# Altium PCB PCB1-CISCO_AP.PcbDoc
Units mm, origin at the board's own origin, x right, y up, seen from the top; angles counter-clockwise.
Board outline 88.97 x 56.99 mm, 2 copper layers (Top Layer, Bottom Layer), stack 1.48 mm thick; 113 components, 49 nets, 356 pads, 284 vias.
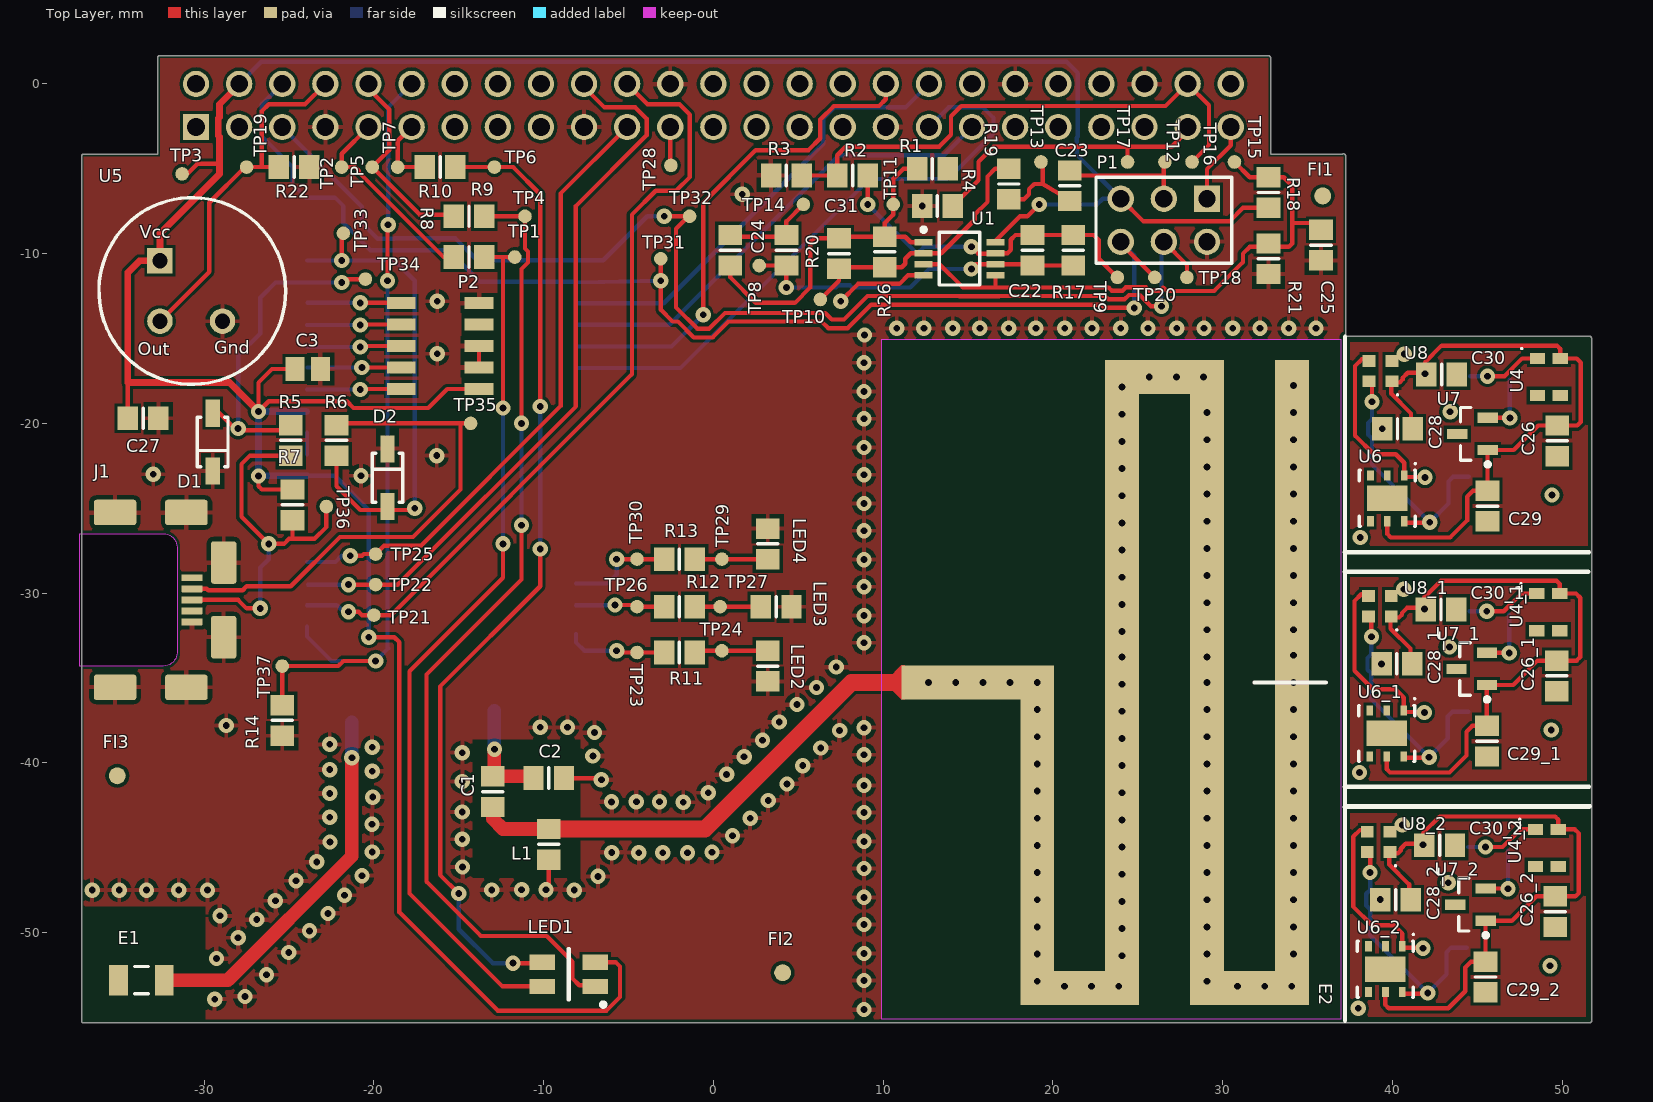
[diagram p0: Top Layer view]
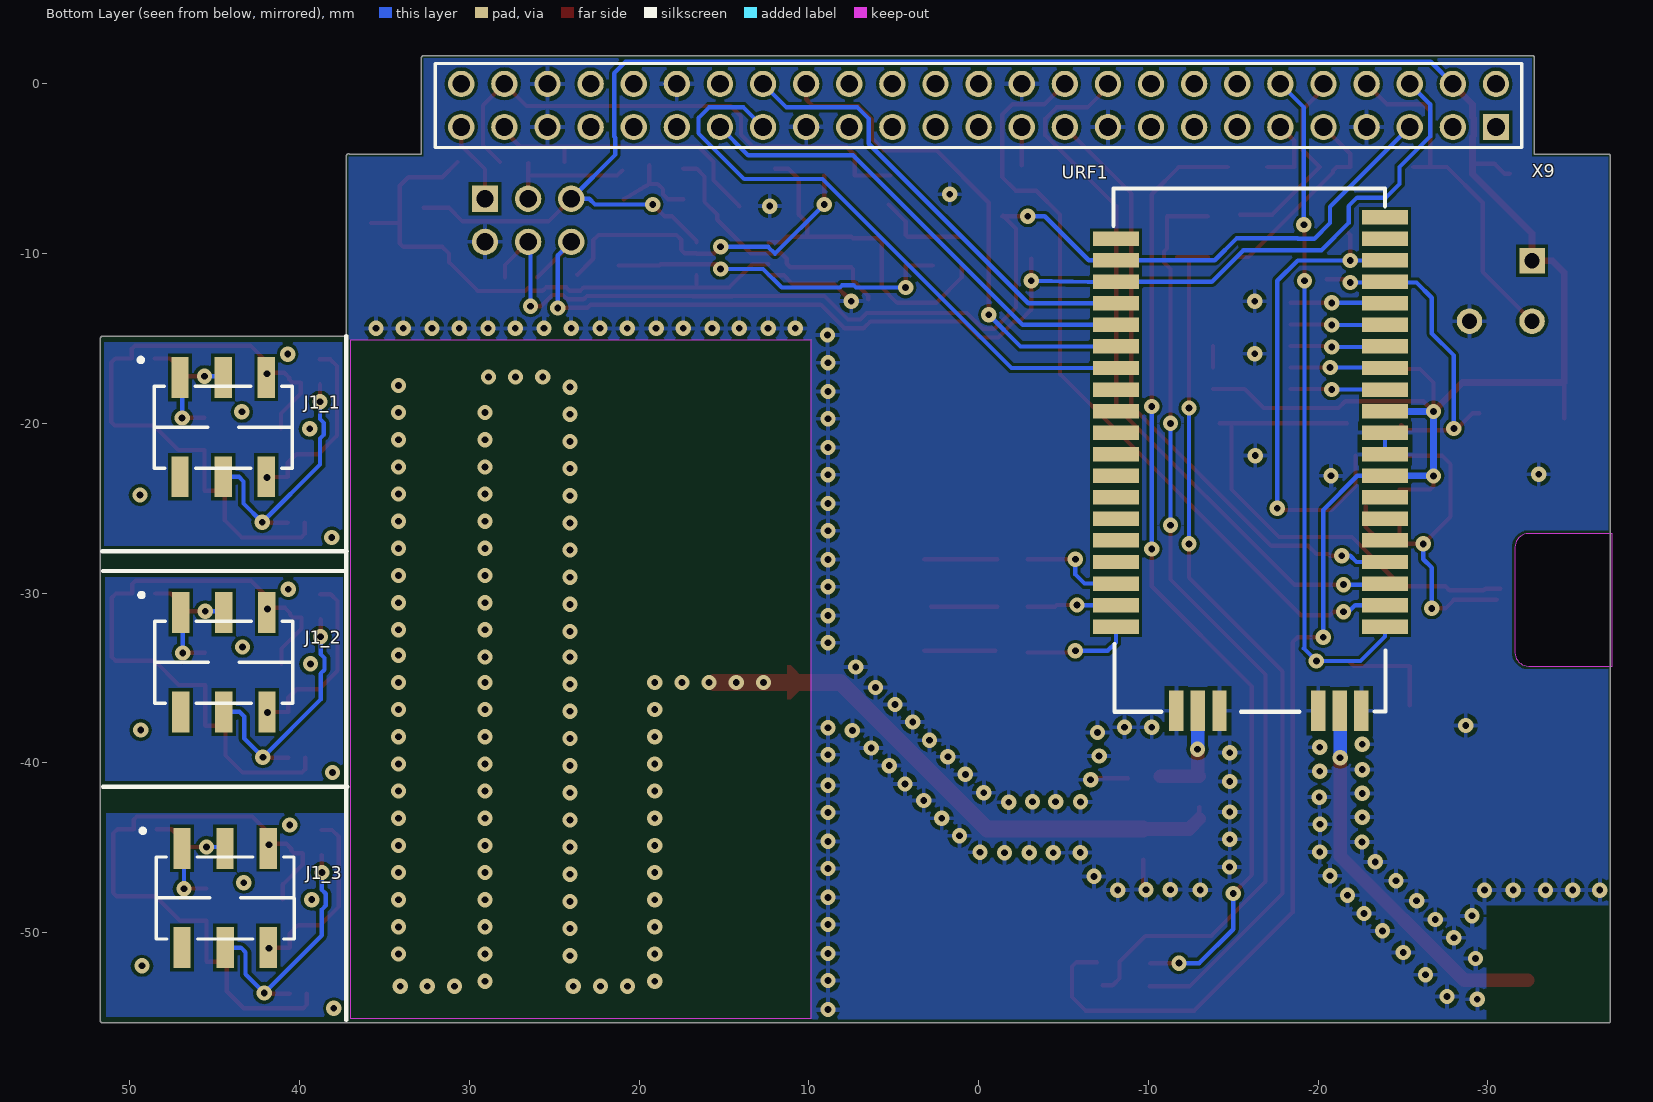
[diagram p1: Bottom Layer view, seen from below]

## Layer stack, top to bottom
Top Solder: solder mask 0.0102, Solder Resist, Dk 3.5
Top Layer: signal copper 0.0356
Dielectric 1: dielectric 1.4086, FR-4, Dk 4.8
Bottom Layer: signal copper 0.0356
Bottom Solder: solder mask 0.0102, Solder Resist, Dk 3.5

## Board outline
-37.1,-55.328 cw(c-37.1,-55.2) -37.227,-55.2 -37.227,-4.264 cw(c-37.1,-4.264) -37.1,-4.137 -32.747,-4.137 -32.747,1.536 cw(c-32.62,1.536) -32.62,1.663 32.7,1.663 cw(c32.7,1.536) 32.827,1.536 32.827,-4.137 37.067,-4.137 cw(c37.125,-4.25) 37.252,-4.25 37.252,-14.866 51.615,-14.866 cw(c51.615,-14.994) 51.742,-14.994 51.742,-55.2 cw(c51.615,-55.2) 51.615,-55.328

## Design rules (kind name [scope] priority, off if disabled: settings)
Clearance [All] p1: gap=0.19
PasteMaskExpansion [All] p1 off: expansion=0
PolygonConnect [All] p1: connectstyle=Relief reliefconductorwidth=0.254 reliefentries=4 polygonreliefangle="90 Angle" airgapwidth=0.254
RoutingVias [All] p1: holewidth=0.4 width=0.9 viastyle="Through Hole" minholewidth=0.3 minwidth=0.7 maxholewidth=0.711 maxwidth=1.27
SolderMaskExpansion [All] p1: expansion=0.102
Width [All] p1: maxlimit=1 minlimit=0.254 preferedwidth=0.254
29 further rules are at their usual default settings.

## Classes and differential pairs
component class Zoul: C1 C2 C3 D1 D2 E1 E2 J1 L1 LED2 LED3 LED4 P2 R5 R6 R7 R11 R12 R13 R14 TP21 TP22 TP23 TP24 TP25 TP26 TP27 TP28 TP29 TP30 TP31 TP32 TP33 TP34 TP35 TP36 TP37 URF1
component class Sensors: C22 C23 C24 C25 C27 C31 P1 R1 R2 R3 R4 R17 R18 R19 R20 R21 R22 R26 TP8 TP9 TP10 TP11 TP12 TP13 TP14 TP15 TP16 TP17 TP18 TP19 TP20 U1 U5
component class Connector: FI1 FI2 FI3 LED1 R8 R9 R10 TP1 TP2 TP3 TP4 TP5 TP6 TP7 X9

## Components (designator, comment, footprint, x,y, rotation, side; value= is the part's Value field where it differs from the comment)
C1 "Cap" 6-0805_N -13,-41.7 r270 top
C2 "Cap" 6-0805_N -9.7,-40.9 r180 top
C3 "Cap Pol3" C0805 -23.9,-16.8 r0 top
C22 "Cap" 6-0805_N 18.8,-9.8 r270 top
C23 "Cap" 6-0805_N 21,-6 r90 top
C24 "Cap" 6-0805_N 1,-9.8 r270 top
C25 "Cap" 6-0805_N 35.8,-9.5 r90 top
C26 "Cap" 6-0805_N 49.72,-21.029 r90 top
C26_1 "Cap" 6-0805_N 49.682,-34.878 r90 top (schematic designator C26)
C26_2 "Cap" 6-0805_N 49.605,-48.769 r90 top (schematic designator C26)
C27 "Cap" 6-0805_N -33.6,-19.7 r180 top
C28 "Cap" 6-0805_N 40.306,-20.32 r0 top
C28_1 "Cap" 6-0805_N 40.268,-34.169 r0 top (schematic designator C28)
C28_2 "Cap" 6-0805_N 40.191,-48.06 r0 top (schematic designator C28)
C29 "Cap" 6-0805_N 45.609,-24.875 r90 top
C29_1 "Cap" 6-0805_N 45.571,-38.724 r90 top (schematic designator C29)
C29_2 "Cap" 6-0805_N 45.494,-52.615 r90 top (schematic designator C29)
C30 "Cap" 6-0805_N 42.906,-17.12 r180 top
C30_1 "Cap" 6-0805_N 42.868,-30.969 r180 top (schematic designator C30)
C30_2 "Cap" 6-0805_N 42.791,-44.86 r180 top (schematic designator C30)
C31 "Cap" 6-0805_N 7.4,-10 r270 top
D1 "3V3" 425 -29.5,-21.1 r90 top
D2 "3V3" 425 -19.2,-23.2 r270 top
E1 "Antenna" INDC3216 -33.7,-52.8 r180 top
E2 "Component_1" DNO24 20.08,-35.264 r270 top
FI1 "Fidutial" FIDU 35.9,-6.6 r0 top
FI2 "Fidutial" FIDU 4.08,-52.364 r0 top
FI3 "Fidutial" FIDU -35.12,-40.764 r0 top
J1 "USB Micro Type B" USB_MICRO-B_MOLEX_SMD -37.2,-30.4 r0 top
J1_1 "SMTC-SSW-103-01-X-D" SMTC-SSW-103-22-X-S-VS 44.507,-21.431 r180 bottom (schematic designator J1)
J1_2 "SMTC-SSW-103-01-X-D" SMTC-SSW-103-22-X-S-VS 44.469,-35.28 r180 bottom (schematic designator J1)
J1_3 "SMTC-SSW-103-01-X-D" SMTC-SSW-103-22-X-S-VS 44.392,-49.171 r180 bottom (schematic designator J1)
L1 "Inductor" 6-0805_N -9.7,-44.8 r270 top
LED1 "WE-LED_RGB_A1B2R3G4-4" 3528_A -8.52,-52.464 r180 top
LED2 "150080GS75000" 6-0805_N 3.2,-34.3 r270 top
LED3 "150080RS75000" 6-0805_N 3.7,-30.8 r0 top
LED4 "5988191107F" 6-0805_N 3.2,-27.1 r90 top
P1 "SMTC-TSW-103-08-X-D" SMTC-TSW-103-08-X-D 29.08,-6.764 r180 top
P2 "FTSH-105-01-L-DV-K" JTAG -16.1,-12.9 r180 top
R1 "Res3" 6-0805_N 12.9,-5 r0 top
R2 "Res3" 6-0805_N 8.2,-5.4 r180 top
R3 "Res3" 6-0805_N 4.3,-5.4 r180 top
R4 "Res3" 6-0805_N 13.2,-7.2 r180 top
R5 "Res3" 6-0805_N -24.9,-21 r90 top
R6 "Res3" 6-0805_N -22.2,-21 r270 top
R7 "Res3" 6-0805_N -24.8,-24.8 r90 top
R8 "Res3" 6-0805_N -14.4,-10.2 r180 top
R9 "Res3" 6-0805_N -14.4,-7.8 r180 top
R10 "Res3" 6-0805_N -16.1,-4.9 r180 top
R11 "Res3" 6-0805_N -2,-33.5 r180 top
R12 "Res3" 6-0805_N -2,-30.8 r180 top
R13 "Res3" 6-0805_N -2,-28 r180 top
R14 "Res3" 6-0805_N -25.4,-37.5 r90 top
R17 "Res3" 6-0805_N 21.2,-9.8 r270 top
R18 "Res3" 6-0805_N 32.7,-6.4 r270 top
R19 "Res3" 6-0805_N 17.4,-5.9 r270 top
R20 "Res3" 6-0805_N 4.3,-9.8 r90 top
R21 "Res3" 6-0805_N 32.7,-10.3 r90 top
R22 "Res3" 6-0805_N -24.7,-4.9 r180 top
R26 "Res3" 6-0805_N 10.1,-9.9 r270 top
TP1 "TEST_POINT" TP -11.7,-10.2 r90 top
TP2 "TEST_POINT" TP -21.9,-4.9 r90 top
TP3 "TEST_POINT" TP -31.3,-5.3 r90 top
TP4 "TEST_POINT" TP -11.1,-7.8 r90 top
TP5 "TEST_POINT" TP -20.1,-4.9 r90 top
TP6 "TEST_POINT" TP -12.9,-4.9 r90 top
TP7 "TEST_POINT" TP -18.6,-4.9 r90 top
TP8 "TEST_POINT" TP 2.7,-10.7 r90 top
TP9 "TEST_POINT" TP 23.8,-11.4 r90 top
TP10 "TEST_POINT" TP 6.3,-12.7 r90 top
TP11 "TEST_POINT" TP 10.6,-7.1 r90 top
TP12 "TEST_POINT" TP 26.6,-4.6 r180 top
TP13 "TEST_POINT" TP 19.3,-4.6 r180 top
TP14 "TEST_POINT" TP 5.3,-7.1 r90 top
TP15 "TEST_POINT" TP 30.7,-4.6 r180 top
TP16 "TEST_POINT" TP 28.2,-4.6 r180 top
TP17 "TEST_POINT" TP 24.4,-4.6 r180 top
TP18 "TEST_POINT" TP 27.9,-11.4 r0 top
TP19 "TEST_POINT" TP -27.5,-4.9 r90 top
TP20 "TEST_POINT" TP 26,-11.4 r0 top
TP21 "TEST_POINT" TP -20,-31.3 r90 top
TP22 "TEST_POINT" TP -19.9,-29.5 r90 top
TP23 "TEST_POINT" TP -4.5,-33.5 r90 top
TP24 "TEST_POINT" TP 0.5,-33.4 r90 top
TP25 "TEST_POINT" TP -19.9,-27.7 r90 top
TP26 "TEST_POINT" TP -4.5,-30.8 r90 top
TP27 "TEST_POINT" TP 0.4,-30.8 r90 top
TP28 "TEST_POINT" TP -2.5,-4.8 r90 top
TP29 "TEST_POINT" TP 0.5,-28 r90 top
TP30 "TEST_POINT" TP -4.5,-28 r90 top
TP31 "TEST_POINT" TP -3.1,-10.3 r90 top
TP32 "TEST_POINT" TP -1.4,-7.8 r90 top
TP33 "TEST_POINT" TP -21.8,-8.8 r90 top
TP34 "TEST_POINT" TP -20.5,-11.5 r90 top
TP35 "TEST_POINT" TP -14.3,-20 r90 top
TP36 "TEST_POINT" TP -22.8,-24.9 r90 top
TP37 "TEST_POINT" TP -25.4,-34.3 r90 top
U1 "ONSC-LM358_NCV2904-8" ONSC-MICRO-8-846A-02_H_V 14.5,-10.3 r0 top
U4 "SPW2430HR5H" DFN3127P600-8N 49.223,-17.275 r0 top
U4_1 "SPW2430HR5H" DFN3127P600-8N 49.185,-31.123 r0 top (schematic designator U4)
U4_2 "SPW2430HR5H" DFN3127P600-8N 49.108,-45.015 r0 top (schematic designator U4)
U5 "EKMC1601111" EKMC1601111 -30.7,-12.2 r0 top
U6 "HTU20D" HTU20D_DFN6 39.706,-24.42 r270 top
U6_1 "HTU20D" HTU20D_DFN6 39.668,-38.269 r270 top (schematic designator U6)
U6_2 "HTU20D" HTU20D_DFN6 39.591,-52.16 r270 top (schematic designator U6)
U7 "MCP9700AT-E/TT" SOT-23-TT3_L 44.719,-20.618 r180 top
U7_1 "MCP9700AT-E/TT" SOT-23-TT3_L 44.681,-34.466 r180 top (schematic designator U7)
U7_2 "MCP9700AT-E/TT" SOT-23-TT3_L 44.604,-48.357 r180 top (schematic designator U7)
U8 "LTR-329ALS" ChipLED4Pin2X2X07 39.306,-16.92 r180 top
U8_1 "LTR-329ALS" ChipLED4Pin2X2X07 39.268,-30.769 r180 top (schematic designator U8)
U8_2 "LTR-329ALS" ChipLED4Pin2X2X07 39.191,-44.66 r180 top (schematic designator U8)
URF1 "RF core with cc2538 and cc1200" ZOUL -16.02,-22.464 r90 bottom
X9 "TSW-125-07-G-D" CISCO_AP_SSW-125-01-X-D -0.04,-1.285 r0 bottom

## Footprints (in the part's own frame and the unit in brackets; to place one, negate y for a bottom-side part, rotate by r counter-clockwise, add the part's x,y. Pads: shape width x height; smd on the part's side, far side on the other; paste and mask are expansions set on the pad)
6-0805_N [mm] "Chip Resistor, Body 2.0x1.2mm, IPC Medium Density"
  rect 1.2x1.4 smd: 1(-0.9,0) 2(0.9,0)
  silkscreen extent 0,-0.6 0,0.6, body extent -1.07,-0.7 1.07,0.7, height 0.7
425 [mm] "SOD-123; 2 Leads; Body 2.7 x 1.6 mm, (LxW)"
  rect 1.6x0.85 smd: 1(-1.7,0) 2(1.7,0)
  silkscreen extent -1.45,-0.9 1.45,0.9
3528_A [mm] "Chip LED, 4-Leads, Body 2.8x3.5mm (max), Pitch 1.42mm, IPC Medium Density"
  rect 1.5x0.9 smd: 1(-1.55,0.707) 2(-1.55,-0.707) 3(1.55,-0.71) 4(1.55,0.707)
  silkscreen extent -2.16,-1.5 0.03,1.9, body extent -1.75,-1.4 1.75,1.4, height 1.87
C0805 [mm] "Chip Capacitor, Body 2.0x1.3mm, IPC High Density"
  rect 1.1x1.4 smd: 1(-0.75,0) 2(0.75,0)
  body extent -1.1,-0.72 1.1,0.72, height 1.4
ChipLED4Pin2X2X07 [mm]
  rect 0.75x0.7 smd: 1(-0.675,0.6) 2(-0.675,-0.6) 3(0.675,-0.6) 4(0.675,0.6)
  silkscreen extent -1.05,1.35 -0.95,1.45, body extent -1,-1 1,1, height 0.7
CISCO_AP_SSW-125-01-X-D [mm]
  rect 1.55x1.55 hole 1.04: 1(-30.44,1.255)
  round 1.55 hole 1.04: 2(-30.44,-1.285) 3(-27.9,1.255) 4(-27.9,-1.285) 5(-25.36,1.255) 6(-25.36,-1.285) 7(-22.82,1.255) 8(-22.82,-1.285) 9(-20.28,1.255) 10(-20.28,-1.285) 11(-17.74,1.255) 12(-17.74,-1.285) 13(-15.2,1.255) 14(-15.2,-1.285) 15(-12.66,1.255) 16(-12.66,-1.285) 17(-10.12,1.255) 18(-10.12,-1.285) 19(-7.58,1.255) 20(-7.58,-1.285) 21(-5.04,1.255) 22(-5.04,-1.285) 23(-2.5,1.255) 24(-2.5,-1.285) 25(0.04,1.255) 26(0.04,-1.285) 27(2.58,1.255) 28(2.58,-1.285) 29(5.12,1.255) 30(5.12,-1.285) 31(7.66,1.255) 32(7.66,-1.285) 33(10.2,1.255) 34(10.2,-1.285) 35(12.74,1.255) 36(12.74,-1.285) 37(15.28,1.255) 38(15.28,-1.285) 39(17.82,1.255) 40(17.82,-1.285) 41(20.36,1.255) 42(20.36,-1.285) 43(22.9,1.255) 44(22.9,-1.285) 45(25.44,1.255) 46(25.44,-1.285) 47(27.98,1.255) 48(27.98,-1.285) 49(30.52,1.255) 50(30.52,-1.285)
  silkscreen extent -31.97,-2.49 32.05,2.46, body extent -31.96,-2.49 32.04,2.46, height 8.41
DFN3127P600-8N [mm] "SPW2430HR5H MEMS Microphone"
  rect 0.9x0.65 smd: 1(-0.675,1.095) 2(-0.675,-1.095) 3(0.675,-1.095) 4(0.675,1.095)
  silkscreen extent -1.65,1.63 -1.55,1.73, body extent -1.25,-1.55 1.25,1.55, height 1
DNO24 [mm] "Monopole PCB Antenna with Single or Dual Band Option"
  rect 2x9 smd paste+0 mask+0: 0(0,-4.5)
  rect 2x7 smd paste+0 mask+0: ""(-18,6.5) ""(18,11.5) ""(18,1.5)
  rect 38x2 smd paste+0 mask+0: ""(0,14) ""(0,9) ""(0,4)
  rect 20x2 smd paste+0 mask+0: ""(9,-1)
  Top Layer region: -1,-8.8 1,-8.8 1,-9 0.2,-9.8 -0.201,-9.8 -1,-8.998
  Keep-Out Layer pour cut-out: -20.2,16.9 -20.2,-10.2 19.8,-10.2 19.8,16.9
  silkscreen extent 0,11.8 0,16
EKMC1601111 [mm] "Panasonic PIR Motion sensor 3 Leads; Pin Circle Dia. 5.08 mm; Lead Dia. 0.53 mm (max)"
  rect 1.5x1.5 hole 0.9: 1(-1.905,1.778)
  round 1.5 hole 0.9: 2(1.778,-1.778) 3(-1.905,-1.778)
  silkscreen extent -5.5,-5.5 5.5,5.5, body extent -6,-6 6,6, height 15
FIDU [mm] "Fidutial_PCB"
  round 1 smd paste-1 mask+0.5: 0(0,0)
HTU20D_DFN6 [mm] "HTU20D, 6-Leads, Body 3.00x3.00mm, Pitch 1.00mm, Thermal Pad 2.40x1.50mm, IPC Medium Density"
  rect 0.6x0.4 smd: 1(-1.35,1) 2(-1.35,0) 3(-1.35,-1) 4(1.35,-1) 5(1.35,0) 6(1.35,1)
  rect 1.5x2.4 smd: 7(0,0)
  silkscreen extent -2.1,-1.65 1.65,1.7, body extent -1.5,-1.5 1.5,1.5, height 1
INDC3216 [mm] "Chip Inductor, Body 3.2x1.6mm, IPC High Density"
  rect 1.1x1.8 smd: 1(-1.35,0) 2(1.35,0)
  silkscreen extent -0.4,-0.8 0.4,0.8, body extent -1.7,-0.9 1.7,0.9, height 0.55
JTAG [mm]
  rect 1.7x0.7 smd: 1(-2.286,5.08) 2(2.286,5.08) 3(-2.286,3.81) 4(2.286,3.81) 5(-2.286,2.54) 6(2.286,2.54) 7(-2.286,1.27) 8(2.286,1.27) 9(-2.286,0) 10(2.286,0)
  body extent -3.05,-0.63 3.05,5.72, height 6.1
ONSC-MICRO-8-846A-02_H_V [mm] "MiniSO-8 8-Leads, Body 3.1x3.1mm, Pitch 0.65mm"
  rect 1.04x0.38 smd: 1(-2.12,0.975) 2(-2.12,0.325) 3(-2.12,-0.325) 4(-2.12,-0.975) 5(2.12,-0.975) 6(2.12,-0.325) 7(2.12,0.325) 8(2.12,0.975)
  silkscreen extent -2.24,-1.55 1.2,1.84, body extent -1.55,-1.55 1.55,1.55, height 1.1
SMTC-SSW-103-22-X-S-VS [mm] "SQ Post Socket, 3 Pins, Vertical, 2.54mm Pitch, Female"
  rect 1.02x2.41 smd: 1(-2.54,-1.715) 2(-2.545,4.135) 3(0,-1.715) 4(-0.005,4.135) 5(2.54,-1.715) 6(2.535,4.135)
  silkscreen extent -4.98,-1.2 4.07,5.29, body extent -4.07,-2.58 4.06,5, height 9.78
SMTC-TSW-103-08-X-D [mm] ".025 SQ Post Terminal Strip Assembly, 2x3 Pins, Vertical, 2.54mm Pitch, Male"
  rect 1.55x1.55 hole 1.02: 1(0,0)
  round 1.55 hole 1.02: 2(0,2.54) 3(2.54,0) 4(2.54,2.54) 5(5.08,0) 6(5.08,2.54)
  silkscreen extent -1.46,-1.27 6.54,3.81, body extent -1.27,-1.27 6.35,3.81, height 8.38
SOT-23-TT3_L [mm] "SOT23, 3-Leads, Body 2.9x1.3mm, Pitch 0.95mm, Lead Span 2.4mm, IPC High Density"
  rect 1.2x0.6 smd: 1(-0.9,0.95) 2(-0.9,-0.95) 3(0.9,0)
  silkscreen extent -1.02,-1.55 0.7,1.92, body extent -0.7,-1.52 0.7,1.53, height 1.12
TP [mm] "Test point to manufacturing"
  round 0.8 smd paste-1: 1(0,0)
USB_MICRO-B_MOLEX_SMD [mm]
  round 0.508 on Mech15: 0(0,0)
  rrect20% 1.25x0.4 smd: 1(6.475,1.3) 2(6.475,0.65) 3(6.475,0) 4(6.475,-0.65) 5(6.475,-1.3)
  rrect20% 2.5x1.5 smd: SH(1.95,-5.15) SH(1.95,5.15) SH(6.15,-5.15) SH(6.15,5.15)
  rrect20% 1.5x2.5 smd: SH(8.35,-2.2) SH(8.35,2.2)
  Keep-Out Layer board cut-out: -0.127,3.9 4.8,3.9 5.106,3.839 5.366,3.666 5.539,3.406 5.6,3.1 5.6,3.1 5.6,-3.1 5.539,-3.406 5.366,-3.666 5.106,-3.839 4.8,-3.9 4.8,-3.9 -0.127,-3.9
  body extent -21.01,-5.5 8.7,5.5, height 4.1
ZOUL [mm]
  rect 0.85x2.7 smd: 1(-9.513,-7.925) 2(-8.243,-7.925) 3(-6.973,-7.925) 4(-5.703,-7.925) 5(-4.433,-7.925) 6(-3.163,-7.925) 7(-1.893,-7.925) 8(-0.623,-7.925) 9(0.647,-7.925) 10(1.917,-7.925) 11(3.187,-7.925) 12(4.457,-7.925) 13(5.727,-7.925) 14(6.997,-7.925) 15(8.267,-7.925) 16(9.537,-7.925) 17(10.807,-7.925) 18(12.077,-7.925) 19(13.347,-7.925) 20(14.617,-7.925) 21(13.347,7.925) 22(12.077,7.925) 23(10.807,7.925) 24(9.537,7.925) 25(8.267,7.925) 26(6.997,7.925) 27(5.727,7.925) 28(4.457,7.925) 29(3.187,7.925) 30(1.917,7.925) 31(0.647,7.925) 32(-0.623,7.925) 33(-1.893,7.925) 34(-3.163,7.925) 35(-4.433,7.925) 36(-5.703,7.925) 37(-6.973,7.925) 38(-8.243,7.925) 39(-9.513,7.925)
  rect 2.4x0.85 smd: 40(-14.466,4.367) 41(-14.466,3.097) 42(-14.466,1.827) 43(-14.466,-3.99) 44(-14.466,-5.26) 45(-14.466,-6.53)
  silkscreen extent -14.52,-7.95 16.3,8.08, body extent -14.45,-8.28 16.44,8.5, height 1.93

## Part data
C1 C2 C22 C23 C24 C25 C26 C26_1 C26_2 C27 C28 C28_1 C28_2 C29 C29_1 C29_2 C30 C30_1 C30_2 C31: "Capacitor"
C3: "Polarized Capacitor (Surface Mount)"
D1 D2: library part "D Zener", "Zener Diode"
E1: "Generic Antenna"
E2: "Antenna SubGhz PCB"
FI1 FI2 FI3: "Fidutial_component"
J1: library part USB_Micro_TypeB_1, "Connector SMD USB Micro Type B middle mount"
LED2: library part "WL-SMCW 0805  150080GS75000", "SMD mono-color Chip LED, WL-SMCW, Green"
LED3: library part "WL-SMCW 0805  150080RS75000", "SMD mono-color Chip LED, WL-SMCW, Red"
LED4: library part LED0, "Blue 473nm LED Indication - Discrete 3.2V 0805 (2012 Metric)"
P2: library part Component_1
R1 R2 R3 R4 R5 R6 R7 R8 R9 R10 R11 R12 R13 R14 R17 R18 R19 R20 R21 R22 R26: "Resistor"
TP1 TP2 TP3 TP4 TP5 TP6 TP7 TP8 TP9 TP10 TP11 TP12 TP13 TP14 TP15 TP16 TP17 TP18 TP19 TP20 TP21 TP22 TP23 TP24 TP25 TP26 TP27 TP28 TP29 TP30 TP31 TP32 TP33 TP34 TP35 TP36 TP37: "Point of test to manufacturing"
U4 U4_1 U4_2: "Knowles MEMS Microphone"
U5: "EKMC1601111 Panasonic PIR Motion Detection Module"
U6 U6_1 U6_2: "Digital relative Humidity sensor with temperature output"
U7 U7_1 U7_2: library part CMP-0192-00218-1, "Low-Power Linear Active Thermistor IC, 3-Pin SOT-23, Extended Temperature, Tape and Reel"
U8 U8_1 U8_2: "Digital Ambient Light Sensor"
URF1: library part ZOUL
X9: library part CON-Samtec-TSW-125-07-G-D-Male, "Header, 2x25 Pins, 2.54 mm pitch"

## Via types
v1: diameter 0.9, hole 0.4, Top Layer to Bottom Layer, 284 vias

## Nets (pads, with @x,y where several pads share a name; then routed paths per layer and width w, separated by ;. In a path a pad name is that pad's centre, name@x,y a point inside that pad or via, vN(x,y) a via of type N, cw(c..) or ccw(c..) an arc to the next point about the centre after c; other vN are vias at no path point)
B: R10.2 TP7.1 X9.11 | length 4.3
  Top Layer w0.254: X9.11 -18.592,-3.352 -18.592,-4.892 TP7.1 R10.2
G: R8.2 TP2.1 X9.9 | length 11.9
  Top Layer w0.254: X9.9 -21.9,-4.12 TP2.1 -21.1,-4.9 -20.881,-5.119 -20.881,-5.223 -15.904,-10.2 R8.2
GND: C2.1 C3.2 C25.1 C27.1 D1.1 D2.1 J1.5 J1.SH L1.2 LED2.2 LED3.2 LED4.2 P1.2 P2.3 P2.5 P2.9 R3.2 R4.2 R14.1 R21.1 R22.1 U1.4 U5.2 URF1.9 URF1.10 URF1.40 URF1.42 URF1.43 URF1.45 X9.7 X9.19 X9.24 X9.33 X9.40 X9.45 X9.46 | length 11.9
  Top Layer w0.254: P2.3 P2.5 ; v1@-9.7,-47.4 L1.2 ; C2.1 v1@-6.7,-40.9 ; v1(7.5,-12.8) 8.519,-11.781 10.958,-11.781 11.464,-11.275 U1.4
  Bottom Layer w0.254: URF1.9 URF1.10
  other v1: 8.873,-54.527 -29.373,-53.927 -27.599,-53.771 8.873,-52.827 -26.333,-52.487 -29.273,-51.527 8.873,-51.227 -25.023,-51.172 -28,-50.3 -23.8,-49.9 8.873,-49.527 -26.901,-49.236 -29.075,-49.015 -22.71,-48.872 -25.805,-48.125 8.873,-47.927 -21.729,-47.804 -36.6,-47.5 -35,-47.5 -33.4,-47.5 -31.5,-47.5 -29.8,-47.5 -13.064,-47.486 -8.2,-47.5 -11.298,-47.472 -9.865,-47.472 -24.594,-46.945 -6.799,-46.69 -20.699,-46.656 8.873,-46.227 -14.786,-46.139 -23.375,-45.834 -4.4,-45.3 -2.981,-45.304 -1.526,-45.304 -5.984,-45.29 -0.085,-45.271 -20.095,-45.257 -22.594,-44.668 8.873,-44.627 -14.8,-44.5 1.128,-44.298 -20.111,-43.623 2.167,-43.27 -22.6,-43.2 8.873,-42.927 -14.8,-42.9 -1.774,-42.32 -6,-42.3 -4.537,-42.299 -3.173,-42.299 3.228,-42.221 -20.071,-42.021 -22.6,-41.8 -0.309,-41.762 8.873,-41.327 4.332,-41.248 -14.8,-41.1 -6.6,-41 0.779,-40.68 -20.103,-40.499 -22.6,-40.4 5.261,-40.165 1.811,-39.647 -7.1,-39.6 8.873,-39.527 -14.8,-39.4 6.322,-39.126 -20.103,-39.082 -22.6,-38.9 2.889,-38.67 -7.001,-38.207 7.437,-38.099 8.873,-37.927 -10.2,-37.9 -8.6,-37.9 -28.7,-37.8 3.884,-37.591 4.921,-36.568 6.078,-35.555 7.238,-34.348 8.873,-32.927 8.873,-31.327 8.873,-29.627 8.873,-28.027 8.873,-26.327 8.873,-24.727 -20.762,-23.088 8.873,-23.027 -33,-23 -16.3,-21.9 8.873,-21.427 8.873,-19.727 8.873,-18.127 8.873,-16.427 -16.264,-15.9 8.9,-14.8 10.8,-14.4 12.4,-14.4 14.1,-14.4 15.7,-14.4 17.4,-14.4 19,-14.4 20.7,-14.4 22.3,-14.4 24,-14.4 25.6,-14.4 27.3,-14.4 28.9,-14.4 30.6,-14.4 32.2,-14.4 33.9,-14.4 35.5,-14.4 -16.264,-12.8 12.3,-7.2 1.7,-6.5
NetC1_1: C1.1 C2.2 URF1.41 | length 6.1
  Top Layer w0.8: C1.1 C2.2@-10.7,-40.8 ; C1.1@-12.923,-40.723 -12.9,-40.7 v1(-12.9,-39.2)
  Bottom Layer w0.8: URF1.41 -12.9,-36.953 v1(-12.9,-39.2)
NetC1_2: C1.2 E2. E2.0 L1.1 | length 33.1
  Top Layer w0.254: -13,-43.3 C1.2
  Top Layer w0.8: -13,-43.3 -12.4,-43.9 L1.1
  Top Layer w1: L1.1 -0.5,-43.9 8.136,-35.264 E2.0
  other v1: 20.68,-53.164 22.28,-53.164 23.88,-53.164 30.88,-53.164 32.48,-53.164 34.08,-53.164 19.08,-52.864 29.08,-52.864 24.08,-51.364 19.08,-51.264 29.08,-51.264 34.18,-51.264 24.08,-49.764 19.08,-49.664 29.08,-49.664 34.18,-49.664 24.08,-48.164 19.08,-48.064 29.08,-48.064 34.18,-48.064 24.08,-46.564 19.08,-46.464 29.08,-46.464 34.18,-46.464 24.08,-44.964 19.08,-44.864 29.08,-44.864 34.18,-44.864 24.08,-43.364 19.08,-43.264 29.08,-43.264 34.18,-43.264 24.08,-41.764 19.08,-41.664 29.08,-41.664 34.18,-41.664 24.08,-40.164 19.08,-40.064 29.08,-40.064 34.18,-40.064 24.08,-38.564 19.08,-38.464 29.08,-38.464 34.18,-38.464 24.08,-36.964 19.08,-36.864 29.08,-36.864 34.18,-36.864 24.08,-35.364 12.68,-35.264 14.28,-35.264 15.88,-35.264 17.48,-35.264 19.08,-35.264 29.08,-35.264 34.18,-35.264 24.08,-33.764 29.08,-33.764 34.18,-33.664 24.08,-32.264 29.08,-32.164 34.18,-32.164 24.08,-30.664 29.08,-30.564 34.18,-30.564 24.08,-29.064 29.08,-28.964 34.18,-28.964 24.08,-27.464 29.08,-27.364 34.18,-27.364 24.08,-25.864 29.08,-25.764 34.18,-25.764 24.08,-24.264 29.08,-24.164 34.18,-24.164 24.08,-22.664 29.08,-22.564 34.18,-22.564 24.08,-21.064 29.08,-20.964 34.18,-20.964 24.08,-19.464 29.08,-19.364 34.18,-19.364 24.08,-17.864 34.18,-17.764 25.68,-17.264 27.28,-17.264 28.88,-17.264
NetC22_1: C22.1 R2.1 R17.1 TP9.1 U1.7 | length 20.2
  Top Layer w0.254: v1(9.1,-7.1) R2.1 ; v1(15.2,-9.6) 15.6,-10 U1.7@16.595,-10 ; U1.7 17.325,-9.975 17.521,-9.779 17.521,-9.179 17.8,-8.9 C22.1 R17.1 22.4,-8.9 22.7,-9.2 22.7,-10.3 TP9.1@23.65,-11.25
  Bottom Layer w0.254: v1(9.1,-7.1) 12,-10 12.4,-9.6 v1(15.2,-9.6)
NetC22_2: C22.2 R17.2 R20.1 TP8.1 U1.6 | length 20
  Top Layer w0.254: TP8.1 R20.1 v1(4.3,-12) ; v1@15.475,-10.625 U1.6 C22.2@18.725,-10.625 ; C22.2 R17.2
  Bottom Layer w0.254: v1(4.3,-12) 7.225,-12 7.356,-11.869 8.044,-11.869 8.175,-12 11.6,-12 12.7,-10.9 v1(15.2,-10.9)
NetC23_1: C23.1 R19.2 TP13.1 | length 5.4
  Top Layer w0.254: R19.2 18.3,-6.8 18.6,-6.5 18.6,-6.2 18.9,-5.9 19.4,-5.9 ; TP13.1@19.4,-4.8 19.4,-5.9 ; C23.1@20.9,-6.8 19.4,-5.9
NetC23_2: C23.2 P1.3 TP12.1 | length 7.8
  Top Layer w0.254: C23.2 21.3,-5.4 26.54,-5.4 ; P1.3 26.54,-5.4 ; TP12.1@26.54,-4.66 26.54,-5.4
NetC24_1: C24.1 R20.2 TP14.1 | length 5.4
  Top Layer w0.254: C24.1@1.054,-9 R20.2@4.2,-9 ; R20.2 4.3,-8.1 TP14.1
NetC24_2: C24.2 C31.1 R1.1 R26.1 TP11.1 U1.1 | length 21.1
  Top Layer w0.254: C24.2 1,-11.4 2.5,-12.9 4.8,-12.9 5.7,-12 5.7,-9.32 5.92,-9.1 C31.1 ; C31.1@7.5,-9 R26.1 ; R1.1 11.2,-5 10.6,-5.6 TP11.1 10.6,-7.7 10.1,-8.2 R26.1 ; U1.1 11.625,-9.325 11.3,-9 R26.1
NetC25_2: C25.2 R18.1 R21.2 TP15.1 U1.3 U1.5 | length 34
  Top Layer w0.254: U1.3 13.325,-10.625 14.7,-12 16.62,-12 U1.5 ; 16.6,-11.992 23.287,-11.992 23.477,-12.181 24.106,-12.181 24.298,-11.989 25.484,-11.989 25.676,-12.181 26.323,-12.181 26.511,-11.993 26.718,-12.2 29.5,-12.2 31.2,-10.5 31.2,-10 31.6,-9.6 33.9,-9.6 34.1,-9.4 34.1,-6 33.6,-5.5 R18.1 31.6,-5.5 TP15.1 ; 34.1,-8.2 C25.2@35.8,-8.2
NetC31_2: C31.2 R19.1 R26.2 TP10.1 U1.2 | length 15.7
  Top Layer w0.254: TP10.1@6.5,-12.7 6.5,-12.5 7.4,-11.6 C31.2 ; C31.2@7.5,-10.8 R26.2 11.1,-10.8 11.3,-10.6 11.3,-10.3 11.625,-9.975 U1.2 13.425,-9.975 15.4,-8 15.4,-7.7 16.15,-6.95 16.15,-5.45 16.6,-5 R19.1
NetD1_2: D1.2 R5.2 TP34.1 URF1.17 | length 20
  Top Layer w0.254: D1.2 -29.1,-19.4 -28.1,-20.4 -25.2,-20.4 R5.2 ; v1(-21.9,-11.7) -21.7,-11.5 TP34.1
  Bottom Layer w0.254: v1(-28,-20.3) -28,-16 -26.7,-14.7 -26.7,-12.6 -25.8,-11.7 v1(-21.9,-11.7)
NetD2_2: D2.2 R6.2 TP33.1 URF1.18 | length 28.6
  Top Layer w0.254: R6.2 -22.2,-23.7 -20.8,-25.1 -19.6,-25.1 v1@-17.9,-25.1 ; v1(-21.9,-10.4) -21.9,-8.9 TP33.1
  Bottom Layer w0.254: URF1.18@-23.932,-10.4 v1(-21.9,-10.4) -18.8,-10.4 -17.6,-11.6 v1(-17.6,-25)
NetE1_1: E1.1 URF1.44 | length 22
  Top Layer w0.8: E1.1 -28.6,-52.8 -21.3,-45.5 v1(-21.3,-39.7)
  Bottom Layer w0.8: v1(-21.3,-39.7) URF1.44@-21.3,-37.6
NetJ1_2: J1.2 R6.1 TP35.1 | length 29.7
  Top Layer w0.254: J1.2 -29.85,-29.75 -29.769,-29.831 -27.731,-29.831 -27.5,-29.6 -24.9,-29.6 -22,-26.7 -17.7,-26.7 -14.9,-23.9 -14.9,-20 ; R6.1@-21.7,-20 TP35.1@-14.2,-20
NetJ1_3: J1.3 R5.1 R7.1 TP36.1 | length 22.6
  Top Layer w0.254: J1.3@-30.525,-30.4 -28,-30.4 -27.5,-30.9 v1(-26.7,-30.9) ; R5.1 -27.3,-21.9 -27.8,-22.4 -27.8,-25.5 v1(-26.2,-27.1) -25.3,-27.1 -25,-26.8 -23.5,-26.8 -22.8,-26.1 TP36.1 ; -24.8,-26.8 R7.1
  Bottom Layer w0.254: v1(-26.7,-30.9) -26.7,-28.5 -26.2,-28 v1(-26.2,-27.1)
NetLED1_1: LED1.1 R9.1 TP4.1 | length 56.9
  Top Layer w0.254: R9.1 TP4.1 -11.1,-9.695 -10.919,-9.877 -10.919,-10.523 -11.3,-10.905 v1(-11.3,-20) ; v1(-11.3,-26) -11.3,-29.2 -16.9,-34.8 -16.9,-47 -13.7,-50.2 -9.814,-50.2 -8.3,-51.714 -8.3,-52.7 -7.9,-53.1 LED1.1@-7.3,-53.1
  Bottom Layer w0.254: v1(-11.3,-26) v1(-11.3,-20)
NetLED1_3: LED1.3 R10.1 TP6.1 | length 57.1
  Top Layer w0.254: v1(-15,-47.7) -16.1,-46.6 -16.1,-35.5 -10.2,-29.6 v1(-10.2,-27.4) ; R10.1@-14.676,-4.9 TP6.1 -11.8,-4.9 -10.2,-6.5 v1(-10.2,-19) ; v1(-11.8,-51.8) LED1.3@-10.116,-51.8
  Bottom Layer w0.254: v1(-15,-47.7) -15,-49.8 -13,-51.8 v1(-11.8,-51.8) ; v1(-10.2,-27.4) v1(-10.2,-19)
NetLED1_4: LED1.4 R8.1 TP1.1 | length 51.8
  Top Layer w0.254: R8.1 -12.4,-10.2 ; v1(-12.4,-27.1) -12.4,-29.1 -17.9,-34.6 -17.9,-47.7 -12.428,-53.172 LED1.4 ; v1(-12.4,-19.1) -12.4,-10.2 ; TP1.1@-12,-10.3 TP1.1@-12.1,-10.2 ; TP1.1 TP1.1@-12.1,-10.2 ; -12.4,-10.2 TP1.1@-12.1,-10.2
  Bottom Layer w0.254: v1(-12.4,-27.1) v1(-12.4,-19.1)
NetLED2_1: LED2.1 R11.1 TP24.1 | length 4.2
  Top Layer w0.254: R11.1@-1,-33.4 LED2.1
NetLED3_1: LED3.1 R12.1 TP27.1 | length 3.9
  Top Layer w0.254: R12.1 LED3.1
NetLED4_1: LED4.1 R13.1 TP29.1 | length 4.3
  Top Layer w0.254: R13.1 LED4.1
NetP1_1: P1.1 X9.49 | length 4.8
  Top Layer w0.254: P1.1 29.08,-5.02 30.48,-3.62 X9.49
NetP1_4: P1.4 TP18.1 TP32.1 URF1.22 X9.5 | length 71.7
  Top Layer w0.254: v1(-2.9,-7.8) TP32.1@-1.384,-7.8 ; TP32.1@-1.44,-7.768 -2.2,-8.528 -2.2,-13.175 -0.944,-14.431 -0.256,-14.431 0.683,-13.492 6.588,-13.492 6.977,-13.881 7.701,-13.881 9.082,-12.5 14.482,-12.5 14.49,-12.508 16.83,-12.508 16.838,-12.5 23.077,-12.5 23.266,-12.689 24.226,-12.689 24.482,-12.433 25.119,-12.433 25.786,-13.1 v1(26.4,-13.1) ; P1.4 27.9,-10.664 TP18.1
  Bottom Layer w0.254: X9.5 -20.7,-7.24 -20.7,-8.2 -19.769,-9.131 -18.82,-9.131 -18.789,-9.1 -15.2,-9.1 -13.912,-10.388 URF1.22 -6.488,-10.388 -3.9,-7.8 v1(-2.9,-7.8) ; v1(26.4,-13.1) P1.4@26.4,-9.444
NetP1_6: P1.6 TP20.1 TP31.1 URF1.23 X9.6 | length 71.4
  Top Layer w0.254: TP31.1 v1(-3.1,-11.6) -3.1,-13.3 -2.4,-14 -2.094,-14 -1.155,-14.939 -0.045,-14.939 0.894,-14 6.377,-14 6.766,-14.389 7.911,-14.389 9.292,-13.008 14.271,-13.008 14.279,-13.016 17.041,-13.016 17.049,-13.008 22.867,-13.008 23.056,-13.197 v1@24.544,-13.197 ; P1.6@24,-9.4 TP20.1
  Bottom Layer w0.254: X9.6 -26.6,-1.2 -26.6,-3.1 -24.8,-4.9 -24.8,-5.9 -24,-6.7 -22.3,-6.7 -21.8,-7.2 -21.8,-8.2 -20.2,-9.8 -15.6,-9.8 -13.742,-11.658 URF1.23 ; URF1.23@-8.053,-11.7 v1(-3.1,-11.6) ; P1.6 24.8,-10.104 v1(24.8,-13.2)
NetP2_2: P2.2 URF1.12 | length 5.5
  Top Layer w0.254: v1@-20.78,-17.98 P2.2
  Bottom Layer w0.254: URF1.12@-23.937,-18 v1(-20.8,-18)
NetP2_4: P2.4 URF1.13 | length 5.5
  Top Layer w0.254: v1(-20.71,-16.71) P2.4
  Bottom Layer w0.254: URF1.13@-23.917,-16.71 v1(-20.71,-16.71)
NetP2_6: P2.6 URF1.14 | length 5.5
  Top Layer w0.254: v1@-20.74,-15.44 P2.6
  Bottom Layer w0.254: URF1.14@-23.912,-15.5 v1(-20.8,-15.5)
NetP2_8: P2.8 URF1.15 | length 5.5
  Top Layer w0.254: v1@-20.77,-14.17 P2.8
  Bottom Layer w0.254: URF1.15@-23.942,-14.2 v1(-20.8,-14.2)
NetP2_10: P2.10 URF1.16 | length 5.5
  Top Layer w0.254: v1(-20.8,-12.9) P2.10
  Bottom Layer w0.254: URF1.16@-23.917,-12.9 v1(-20.8,-12.9)
NetR2_2: R2.2 R3.1 TP16.1 X9.48 | length 31.9
  Top Layer w0.254: R3.1 R2.2 7.3,-4.2 7.804,-3.696 13.304,-3.696 14,-3 14,-1.9 14.6,-1.3 26.64,-1.3 X9.48 29.2,-1.26 29.2,-3.6 TP16.1
NetR4_1: R4.1 TP17.1 X9.47 | length 17.4
  Top Layer w0.254: R4.1 15.619,-5.681 15.619,-4.581 16.5,-3.7 24.4,-3.7 ; TP17.1 24.4,-3.7 ; X9.47 27.94,-2.76 27,-3.7 24.4,-3.7
NetR11_2: R11.2 TP23.1 URF1.39 | length 5.8
  Top Layer w0.254: v1@-5.6,-33.5 TP23.1 R11.2
  Bottom Layer w0.254: -8.095,-32.405 -8.095,-32.905 -7.6,-33.4 v1(-5.7,-33.4)
NetR12_2: R12.2 TP26.1 URF1.38 | length 5.2
  Top Layer w0.254: v1(-5.8,-30.7) -4.6,-30.7 TP26.1 R12.2
  Bottom Layer w0.254: URF1.38 v1@-5.808,-30.708
NetR13_2: R13.2 TP30.1 URF1.37 | length 6.3
  Top Layer w0.254: v1(-5.7,-28) TP30.1 R13.2
  Bottom Layer w0.254: URF1.37 -6.238,-29.438 -5.7,-28.9 v1(-5.7,-28)
NetR14_2: R14.2 TP37.1 URF1.1 X9.12 | length 48.1
  Top Layer w0.254: R14.2 TP37.1 -22.1,-34.3 -21.8,-34 v1(-19.9,-34) ; v1(-19.2,-11.6) -19.2,-8.336 v1(-19.164,-8.3)
  Bottom Layer w0.254: URF1.1 -23.945,-32.555 -22.5,-34 v1(-19.9,-34) -19.164,-33.264 -19.2,-33.228 v1(-19.2,-11.6) ; v1(-19.164,-8.3) -19.164,-1.384 X9.12
NetR22_2: R22.2 TP19.1 U5.3 X9.8 | length 20.9
  Top Layer w0.254: U5.3 -29.7,-11.073 -29.7,-7 -27.6,-4.9 -26.6,-4.9 ; R22.2 -26.6,-4.9 ; X9.8 -24.06,-1.2 -26.2,-1.2 -26.6,-1.6 -26.6,-4.9
NetTP21_1: TP21.1 URF1.2 X9.22 | length 47.1
  Top Layer w0.254: v1(-21.5,-31.1) -20.9,-31.1 -20.7,-31.3 TP21.1 -19,-31.3 -4.8,-17.1 -4.8,-7.7 -3.4,-6.3 -2.195,-6.3 -1.384,-5.489 -1.384,-1.816 -2,-1.2 -3.88,-1.2 X9.22
  Bottom Layer w0.254: URF1.2 -22.192,-30.708 -21.8,-31.1 v1(-21.5,-31.1)
NetTP22_1: TP22.1 URF1.3 X9.20 | length 43.3
  Top Layer w0.254: v1(-21.5,-29.5) TP22.1 -18.6,-29.5 -8.1,-19 -8.1,-7.195 -3.924,-3.019 -3.924,-2.061 -4.601,-1.384 -6.416,-1.384 X9.20@-7.62,-0.18
  Bottom Layer w0.254: URF1.3@-23.882,-29.5 v1(-21.5,-29.5)
NetTP25_1: TP25.1 URF1.4 X9.21 | length 36.8
  Top Layer w0.254: v1(-21.4,-27.8) -20.7,-27.8 -20.6,-27.7 TP25.1 -19.408,-27.208 -17.233,-27.208 -9,-18.975 -9,-6.46 X9.21
  Bottom Layer w0.254: URF1.4 -22.268,-28.168 -21.9,-27.8 v1(-21.4,-27.8)
NetTP28_1: TP28.1 X9.23 | length 2.3
  Top Layer w0.254: TP28.1@-2.54,-4.8 X9.23
NetURF1_24: URF1.24 X9.36 | length 27
  Bottom Layer w0.254: URF1.24 -2.927,-12.928 6.473,-3.527 6.473,-3.027 6.464,-3.019 6.464,-2.061 7.141,-1.384 8.099,-1.384 8.107,-1.393 8.116,-1.384 11.316,-1.384 X9.36
NetURF1_25: URF1.25 X9.37 | length 28.2
  Bottom Layer w0.254: URF1.25 -2.598,-14.198 7.4,-4.2 13.58,-4.2 X9.37
NetURF1_26: URF1.26 X9.34 | length 30
  Top Layer w0.254: v1@-0.6,-13.9 -0.6,-7 2.5,-3.9 5.6,-3.9 6.3,-3.2 6.3,-2.1 7.1,-1.3 9.765,-1.3 10.16,-0.905 X9.34
  Bottom Layer w0.254: URF1.26 -2.467,-15.468 v1(-0.6,-13.6)
NetURF1_27: URF1.27 X9.35 | length 35.8
  Bottom Layer w0.254: URF1.27 -1.937,-16.738 9.2,-5.6 13.815,-5.6 16.5,-2.915 16.5,-2 15.884,-1.384 13.856,-1.384 X9.35
R: R9.2 TP5.1 X9.10 | length 11.7
  Top Layer w0.254: X9.10 -20.32,-0.28 -19.1,-1.5 -19.1,-3.9 TP5.1 -17.3,-7.7 R9.2@-15.4,-7.7
VCC: C3.1 C27.2 LED1.2 P1.5 P2.1 R7.2 R18.2 TP3.1 U1.8 U5.1 URF1.8 URF1.11 X9.4 | length 189.8
  Top Layer w0.254: C27.2 -34.5,-17.6 ; TP3.1 -31,-5.3 -30.4,-4.7 -29.1,-4.7 ; X9.4 X9.4@-27.9,0 ; v1(-26.8,-23.1) -26.8,-23.7 -26.6,-23.9 R7.2 ; C3.1 -26,-16.8 -26.8,-17.6 v1(-26.8,-19.3) -26.2,-18.7 -21.6,-18.7 -21.2,-19.1 -16.8,-19.1 -15.68,-17.98 P2.1 ; v1(-20.3,-32.6) -18.8,-32.6 -18.5,-32.9 -18.5,-48.8 -12.7,-54.6 -6.3,-54.6 -5.5,-53.8 -5.5,-52 -5.743,-51.757 LED1.2 ; U1.8 16.62,-9.241 18.061,-7.8 18.5,-7.8 v1(19.2,-7.1) ; P1.5 25.336,-8.1 30.4,-8.1 31.2,-7.3 R18.2
  Top Layer w0.4: X9.4@-27.9,0 -29.1,-1.2 -29.1,-1.962 -29.169,-2.031 -29.169,-3.049 -29.1,-3.118 -29.1,-4.7 -29.1,-5.3 -32.605,-8.805 U5.1 -33.822,-10.422 -34.5,-11.1 -34.5,-17.6 -28.5,-17.6 v1(-26.8,-19.3)
  Bottom Layer w0.254: X9.4 -26.64,1.3 20.8,1.3 21.476,0.624 21.476,-3.095 21.4,-3.171 21.4,-4.164 P1.5 22.936,-6.764 22.6,-7.1 v1(19.2,-7.1) ; v1@-26.8,-22.7 v1@-26.412,-23.088 ; URF1.8 -22.313,-23.088 -20.3,-25.1 v1(-20.3,-32.6)
  Bottom Layer w0.4: v1@-26.8,-22.7 v1(-26.8,-19.3) URF1.11@-23.967,-19.3 ; v1@-26.412,-23.088 URF1.8
pads on no net: C26.1 C26.2 C26_1.1 C26_1.2 C26_2.1 C26_2.2 C28.1 C28.2 C28_1.1 C28_1.2 C28_2.1 C28_2.2 C29.1 C29.2 C29_1.1 C29_1.2 C29_2.1 C29_2.2 C30.1 C30.2 C30_1.1 C30_1.2 C30_2.1 C30_2.2 E1.2 FI1.0 FI2.0 FI3.0 J1.0 J1.1 J1.4 J1_1.1 J1_1.2 J1_1.3 J1_1.4 J1_1.5 J1_1.6 J1_2.1 J1_2.2 J1_2.3 J1_2.4 J1_2.5 J1_2.6 J1_3.1 J1_3.2 J1_3.3 J1_3.4 J1_3.5 J1_3.6 P2.7 R1.2 U4.1 U4.2 U4.3 U4.4 U4_1.1 U4_1.2 U4_1.3 U4_1.4 U4_2.1 U4_2.2 U4_2.3 U4_2.4 U6.1 U6.2 U6.3 U6.4 U6.5 U6.6 U6.7 U6_1.1 U6_1.2 U6_1.3 U6_1.4 U6_1.5 U6_1.6 U6_1.7 U6_2.1 U6_2.2 U6_2.3 U6_2.4 U6_2.5 U6_2.6 U6_2.7 U7.1 U7.2 U7.3 U7_1.1 U7_1.2 U7_1.3 U7_2.1 U7_2.2 U7_2.3 U8.1 U8.2 U8.3 U8.4 U8_1.1 U8_1.2 U8_1.3 U8_1.4 U8_2.1 U8_2.2 U8_2.3 U8_2.4 URF1.5 URF1.6 URF1.7 URF1.19 URF1.20 URF1.21 URF1.28 URF1.29 URF1.30 URF1.31 URF1.32 URF1.33 URF1.34 URF1.35 URF1.36 X9.1 X9.2 X9.3 X9.13 X9.14 X9.15 X9.16 X9.17 X9.18 X9.25 X9.26 X9.27 X9.28 X9.29 X9.30 X9.31 X9.32 X9.38 X9.39 X9.41 X9.42 X9.43 X9.44 X9.50
copper on no net: | length 214.8
  Top Layer w0.254: v1(38.691,-46.46) 38.691,-45.435 ; 38.716,-43.96 38.091,-43.96 37.691,-44.36 37.691,-48.46 38.791,-49.56 40.091,-49.56 40.592,-50.061 40.592,-50.898 v1@41.789,-50.898 ; v1(38.768,-32.569) 38.768,-31.544 ; 38.793,-30.069 38.168,-30.069 37.768,-30.469 37.768,-34.569 38.868,-35.669 40.168,-35.669 40.669,-36.17 40.669,-37.007 v1@41.865,-37.007 ; v1(38.806,-18.72) 38.806,-17.695 ; 38.831,-16.22 38.206,-16.22 37.806,-16.62 37.806,-20.72 38.906,-21.82 40.206,-21.82 40.707,-22.322 40.707,-23.158 v1@41.904,-23.158 ; 39.592,-53.598 39.592,-54.261 39.791,-54.46 43.291,-54.46 44.291,-53.46 44.291,-52.06 44.637,-51.715 45.494,-51.715 45.494,-49.317 45.504,-49.307 47.044,-49.307 48.482,-47.869 49.605,-47.869 50.782,-47.869 50.991,-47.66 50.991,-44.16 50.751,-43.92 49.783,-43.92 49.783,-43.352 49.591,-43.16 42.791,-43.16 41.812,-44.14 v1(41.812,-44.821) ; 39.669,-39.707 39.669,-40.37 39.868,-40.569 43.368,-40.569 44.368,-39.569 44.368,-38.169 44.713,-37.824 45.571,-37.824 45.571,-35.426 45.581,-35.416 47.121,-35.416 48.559,-33.978 49.682,-33.978 50.859,-33.978 51.068,-33.769 51.068,-30.269 50.827,-30.028 49.86,-30.028 49.86,-29.461 49.668,-29.269 42.868,-29.269 41.889,-30.248 v1(41.889,-30.93) ; 39.707,-25.858 39.707,-26.522 39.906,-26.72 43.406,-26.72 44.406,-25.72 44.406,-24.32 44.752,-23.975 45.609,-23.975 45.609,-21.578 45.619,-21.568 47.159,-21.568 48.597,-20.129 49.72,-20.129 50.897,-20.129 51.106,-19.92 51.106,-16.42 50.865,-16.18 49.898,-16.18 49.898,-15.613 49.706,-15.42 42.906,-15.42 41.927,-16.4 v1(41.927,-17.081) ; 40.592,-53.598 42.335,-53.598 42.297,-53.56 v1(42.091,-53.56) ; 40.669,-39.707 42.412,-39.707 42.374,-39.669 v1(42.168,-39.669) ; 40.707,-25.858 42.45,-25.858 42.412,-25.82 v1(42.206,-25.82) ; 40.991,-48.045 40.991,-47.16 39.817,-45.986 39.817,-45.334 40.317,-45.334 40.491,-45.16 40.491,-45.06 40.791,-44.76 v1@41.591,-44.76 ; 41.068,-34.154 41.068,-33.269 39.893,-32.095 39.893,-31.443 40.394,-31.443 40.568,-31.269 40.568,-31.169 40.868,-30.869 v1@41.668,-30.869 ; 41.106,-20.305 41.106,-19.42 39.932,-18.246 39.932,-17.594 40.432,-17.594 40.606,-17.42 40.606,-17.32 40.906,-17.02 v1@41.706,-17.02 ; v1(45.491,-44.96) 46.491,-44.96 47.532,-43.92 48.433,-43.92 ; 45.504,-47.407 v1@46.798,-47.407 ; v1(45.568,-31.069) 46.568,-31.069 47.609,-30.028 48.51,-30.028 ; 45.581,-33.516 v1@46.875,-33.516 ; v1(45.606,-17.22) 46.606,-17.22 47.647,-16.18 48.548,-16.18 ; 45.619,-19.668 v1@46.913,-19.668
  Bottom Layer w0.254: v1@38.691,-46.56 38.691,-47.485 38.46,-47.716 38.46,-48.404 38.691,-48.635 38.691,-50.16 v1(42.091,-53.56) 43.191,-52.46 43.191,-51.16 43.465,-50.886 44.392,-50.886 ; v1@38.768,-32.669 38.768,-33.594 38.537,-33.825 38.537,-34.513 38.768,-34.744 38.768,-36.269 v1(42.168,-39.669) 43.268,-38.569 43.268,-37.269 43.542,-36.995 44.469,-36.995 ; v1@38.806,-18.82 38.806,-19.745 38.575,-19.976 38.575,-20.665 38.806,-20.896 38.806,-22.42 v1(42.206,-25.82) 43.306,-24.72 43.306,-23.42 43.58,-23.146 44.507,-23.146 ; 44.473,-44.96 v1(45.491,-44.96) ; 44.549,-31.069 v1(45.568,-31.069) ; 44.588,-17.22 v1(45.606,-17.22) ; v1(46.812,-47.421) 46.812,-45.161 ; v1(46.889,-33.53) 46.889,-31.27 ; v1(46.927,-19.681) 46.927,-17.421
  other v1: 37.991,-54.46 49.291,-51.96 41.812,-50.921 39.291,-48.06 43.291,-47.06 40.591,-43.66 38.068,-40.569 49.368,-38.069 41.889,-37.03 39.368,-34.169 43.368,-33.169 40.668,-29.769 38.106,-26.72 49.406,-24.22 41.927,-23.181 39.406,-20.32 43.406,-19.32 40.706,-15.92

## Polygon pours and split planes (outlines as drawn)
no net on Top Layer "GND POLIGON" (solid, pour order 12): 37.391,-54.96 37.391,-42.96 51.391,-42.96 51.391,-54.96 37.391,-54.96
no net on Top Layer "GND POLIGON" (solid, pour order 8): 37.468,-41.069 37.468,-29.069 51.468,-29.069 51.468,-41.069 37.468,-41.069
no net on Top Layer "GND POLIGON" (solid, pour order 4): 37.506,-27.22 37.506,-15.22 51.506,-15.22 51.506,-27.22 37.506,-27.22
GND on Top Layer "GND POLIGON" (solid, remove dead copper, pour order 0): -37.1,-55.1 -37.1,-4.3 -32.6,-4.3 -32.6,1.5 32.7,1.5 32.7,-4.3 37.1,-4.3 37.1,-55.1 -37.1,-55.1
no net on Bottom Layer "GND POLIGON" (solid, pour order 14): 37.391,-54.96 37.391,-42.96 51.391,-42.96 51.391,-54.96 37.391,-54.96
no net on Bottom Layer "GND POLIGON" (solid, pour order 10): 37.468,-41.069 37.468,-29.069 51.468,-29.069 51.468,-41.069 37.468,-41.069
no net on Bottom Layer "GND POLIGON" (solid, pour order 6): 37.506,-27.22 37.506,-15.22 51.506,-15.22 51.506,-27.22 37.506,-27.22
GND on Bottom Layer "GND POLIGON B" (solid, pour order 2): -37.1,-55.1 -37.1,-4.3 -32.6,-4.3 -32.6,1.5 32.7,1.5 32.7,-4.3 37.1,-4.3 37.1,-55.1 -37.1,-55.1

## Other copper
Top Layer:
  pour cut-out: -37,-48.45 -29.9,-48.45 -29.9,-55.35 -37,-55.35
  pour cut-out: -14.2,-38.6 -7.8,-38.6 -7.8,-46.8 -14.2,-46.8
Bottom Layer:
  pour cut-out: -37.1,-48.4 -29.9,-48.4 -29.9,-55.3 -37.1,-55.3

## Silkscreen, mask and mechanical layers (free items; w line width, h text height)
Top Overlay:
  lines w0.254: 37.189,-27.587 51.588,-27.587 ; 37.205,-42.6 51.598,-42.6 ; 37.205,-41.408 51.588,-41.408 ; 37.205,-28.741 51.539,-28.741 ; 37.21,-55.197 37.21,-14.9 ; 37.249,-42.555 51.643,-42.555
Bottom Overlay:
  lines w0.254: 37.205,-41.408 51.588,-41.408 ; 37.233,-27.542 51.632,-27.542 ; 37.249,-28.696 51.584,-28.696 ; 37.255,-55.153 37.255,-14.855
Mechanical 1:
  lines w0.254: -32.62,-4.264 -37.1,-4.264 -37.1,-55.2 51.615,-55.2 51.615,-14.994 37.125,-14.994 37.125,-4.25 ; -32.62,-4.2 -32.62,1.536 32.7,1.536 32.7,-4.264 37.1,-4.264
Mechanical 15:
  lines w0.254: 37.391,-54.96 37.391,-42.96 51.391,-42.96 51.391,-54.96 37.391,-54.96 ; 37.468,-41.069 37.468,-29.069 51.468,-29.069 51.468,-41.069 37.468,-41.069 ; 37.506,-27.22 37.506,-15.22 51.506,-15.22 51.506,-27.22 37.506,-27.22

## Text inside footprints (layer, text, board x,y; h text height)
U5: Top Overlay "Vcc" at -33.8,-9.1 h0.76; Top Overlay "Out" at -33.9,-16 h0.76; Top Overlay "Gnd" at -29.4,-15.9 h0.76